# Altium PCB PCB1.PcbDoc
Units mm, origin at the board's own origin, x right, y up, seen from the top; angles counter-clockwise.
Board outline 100 x 100 mm, 2 copper layers (Top Layer, Bottom Layer); 30 components, 22 nets, 87 pads, 11 vias.
Unrouted connection lines stored in the file: 1.
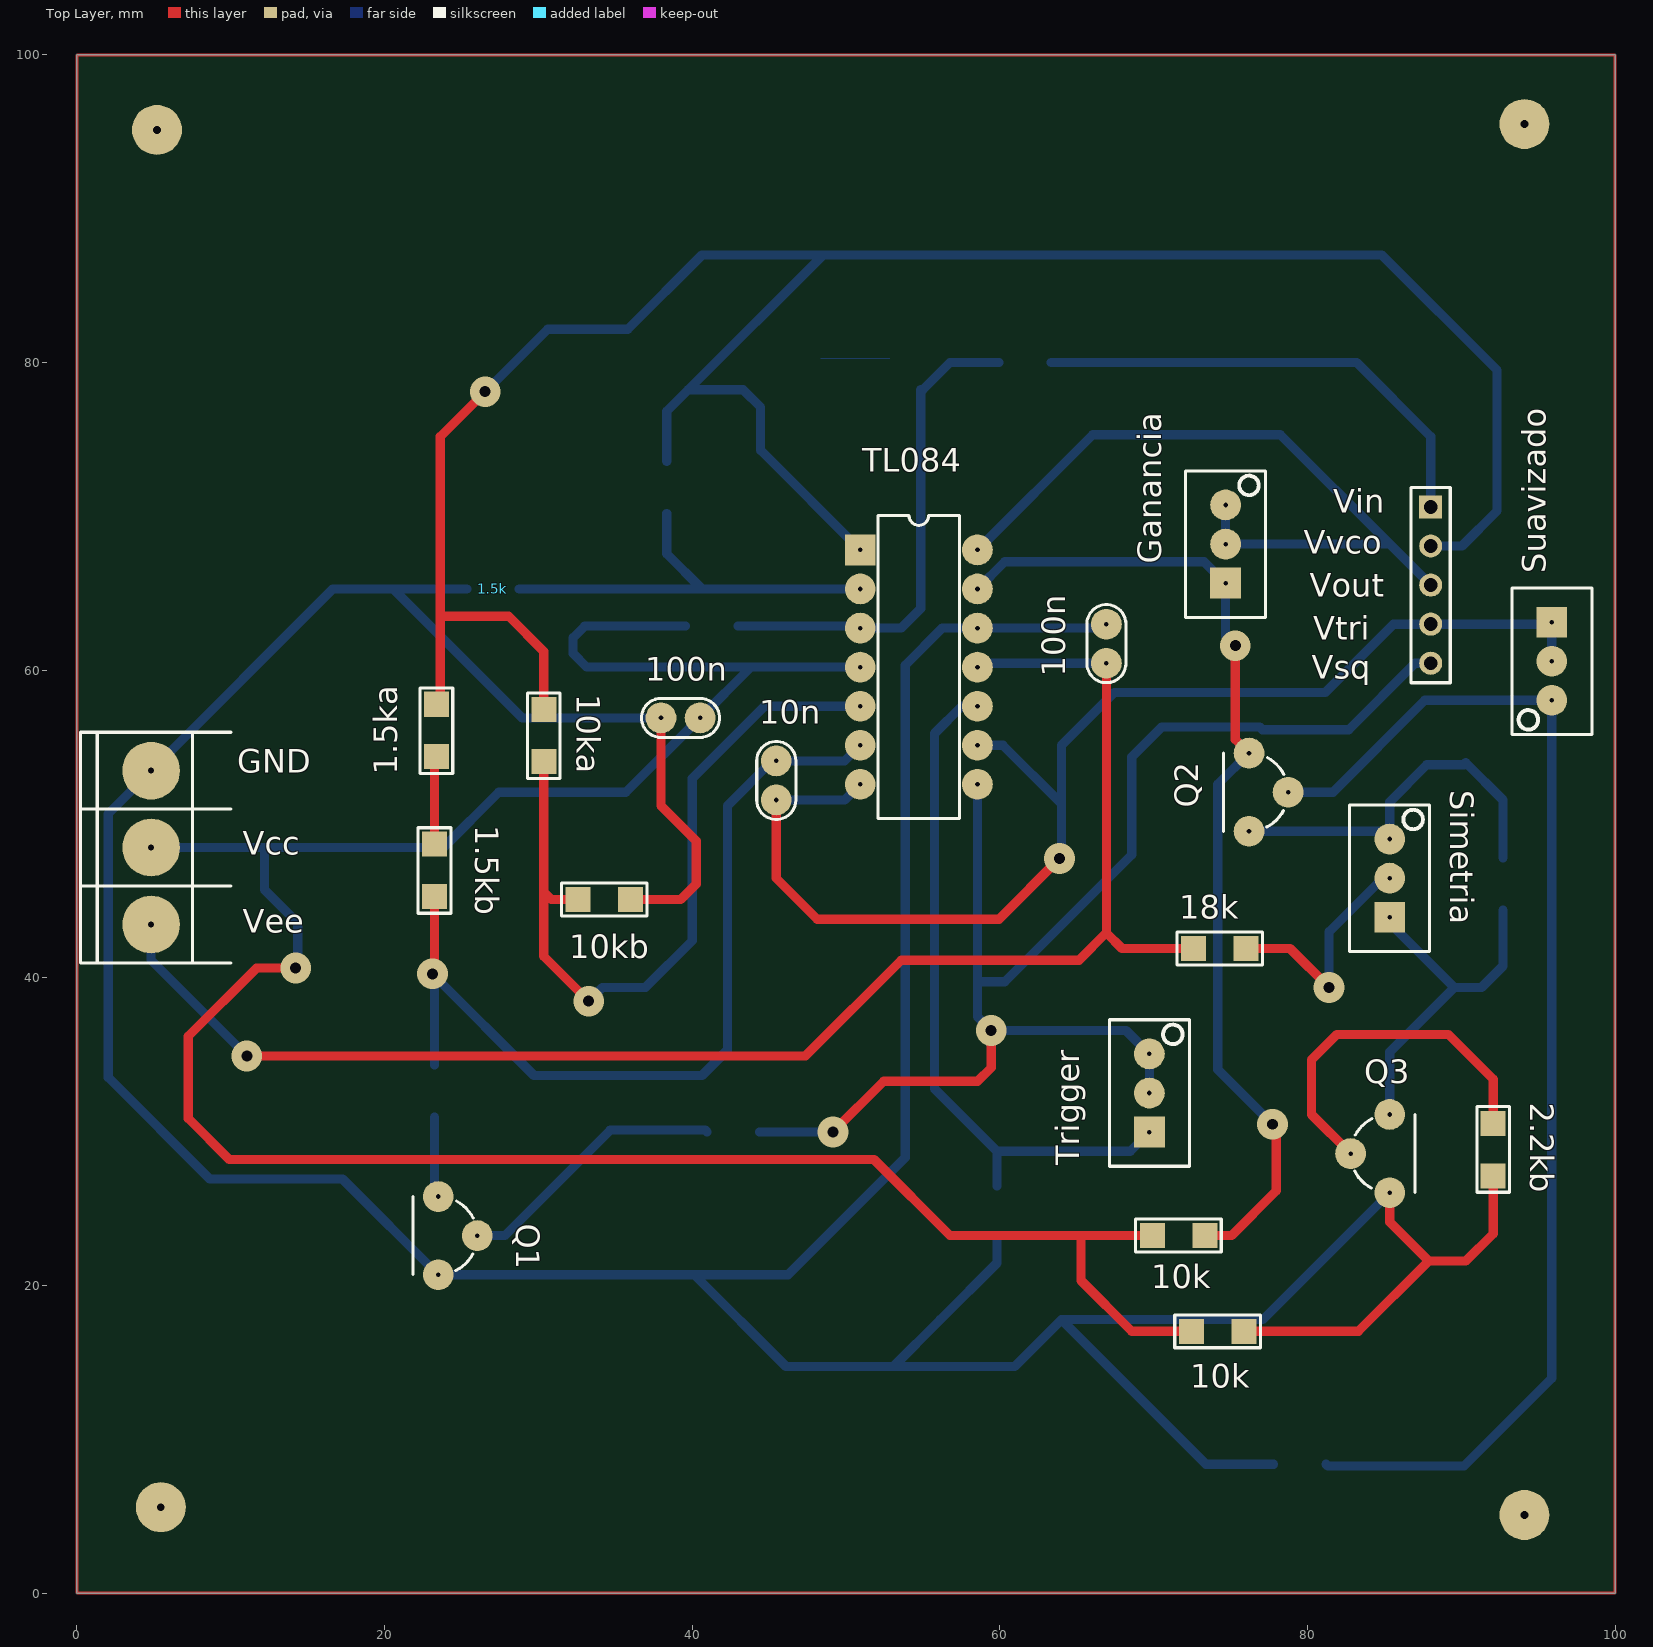
[diagram p0: Top Layer view]
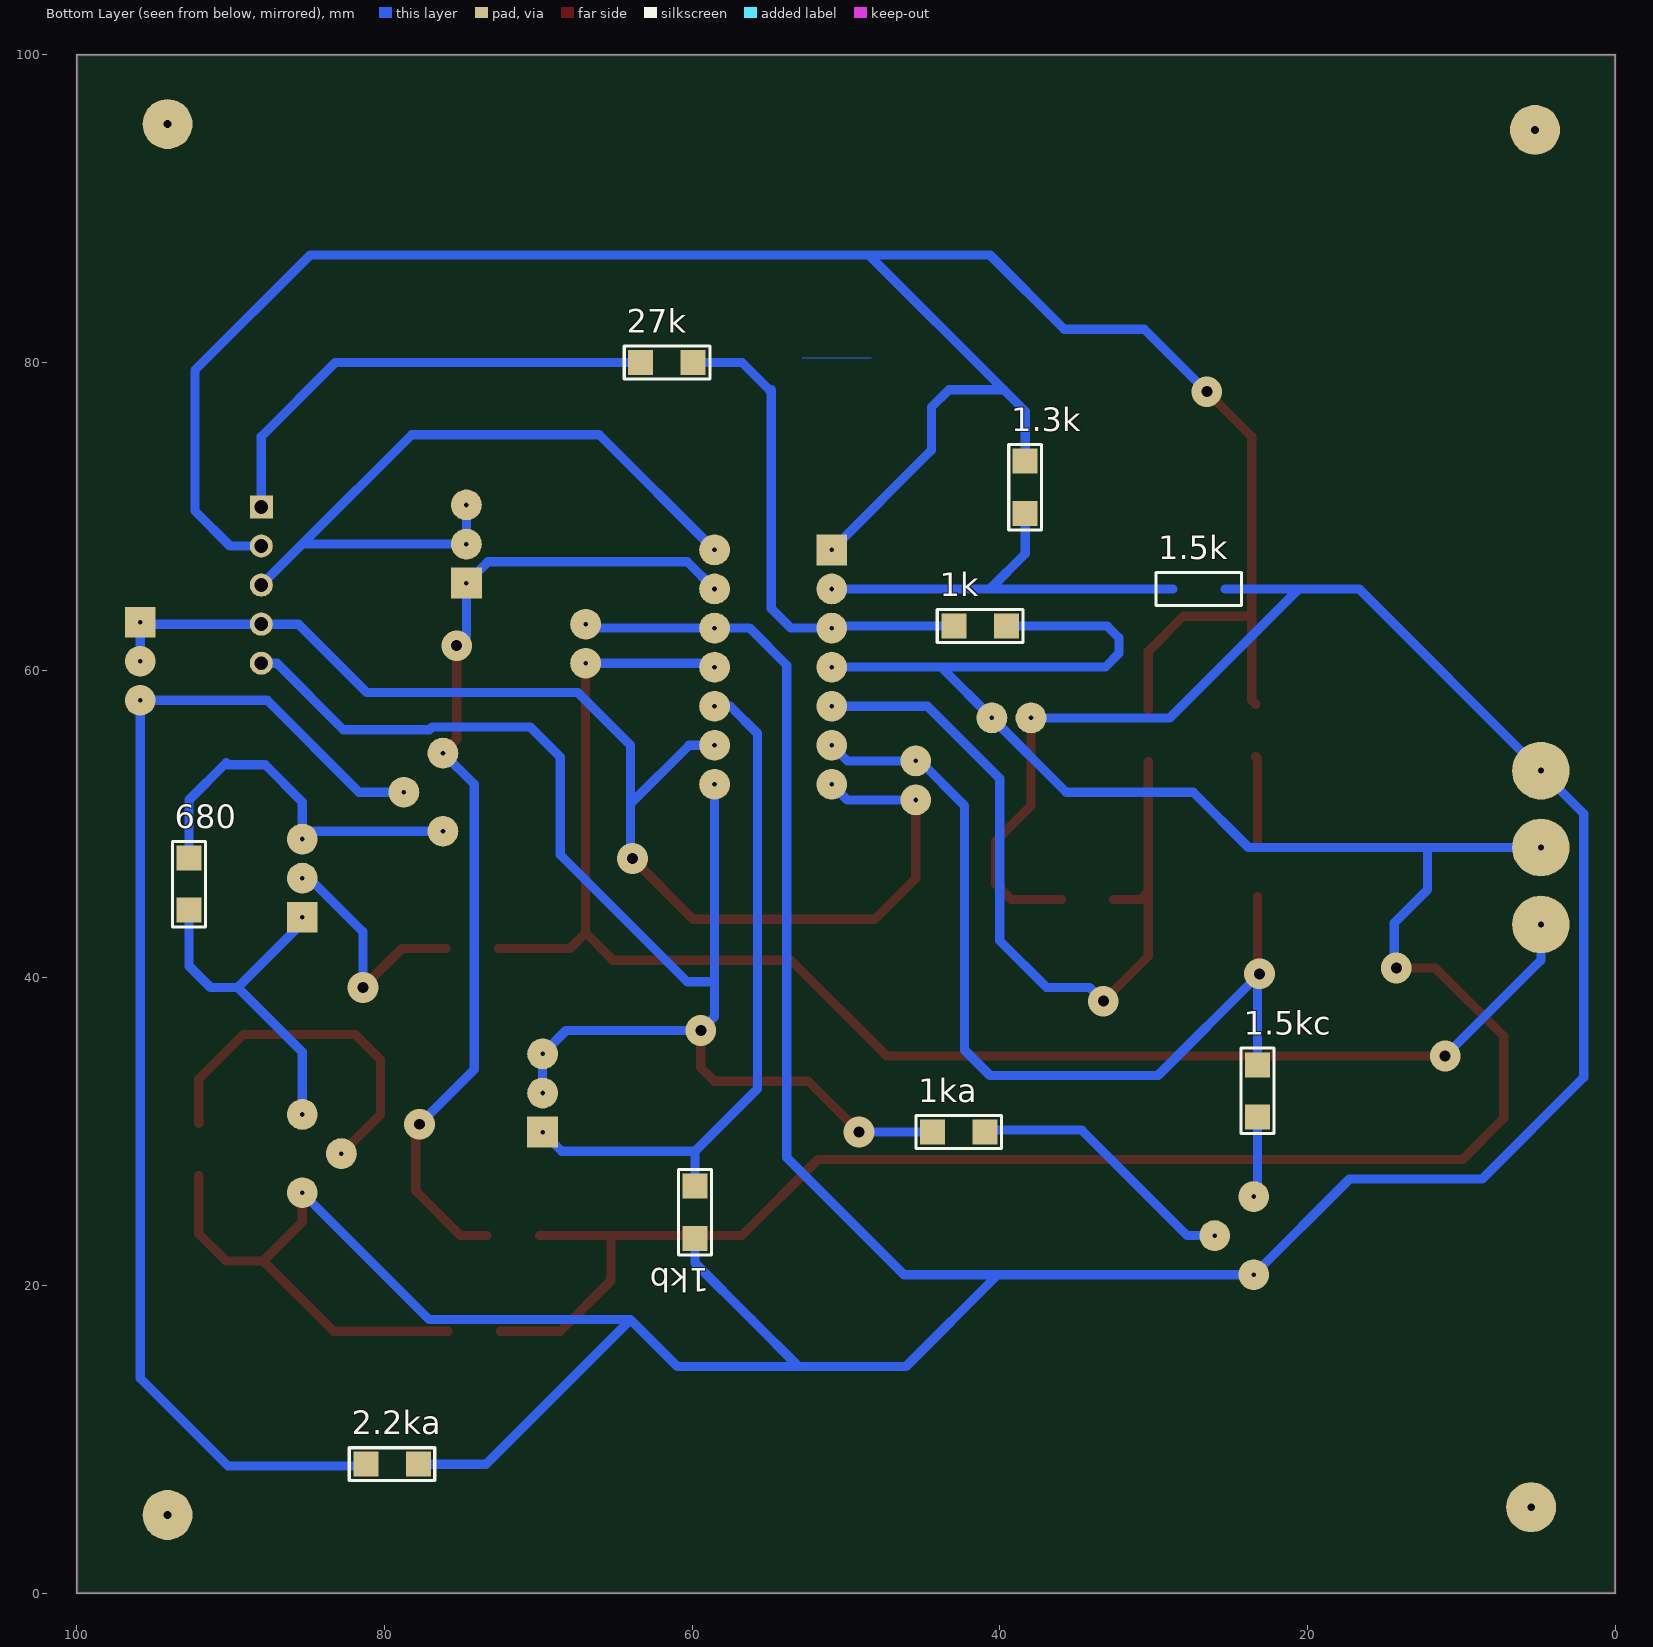
[diagram p1: Bottom Layer view, seen from below]
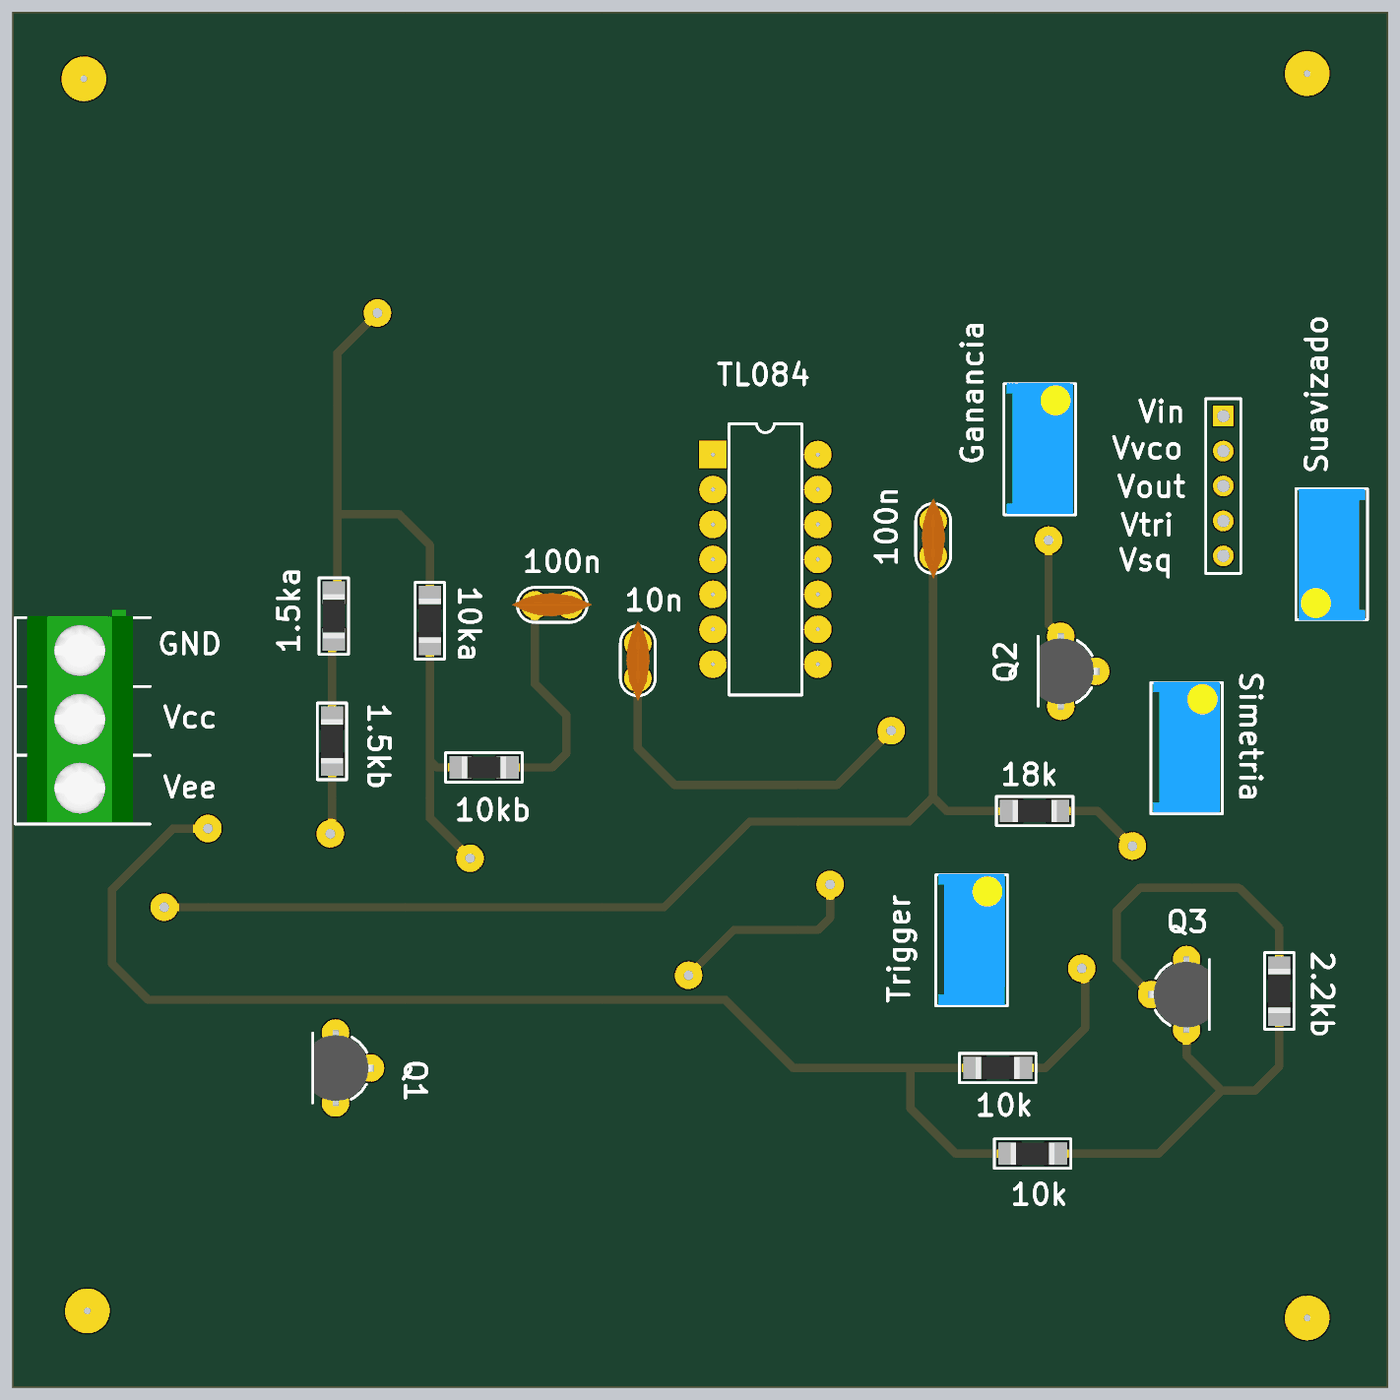
[diagram p2: 3D render of the assembled board from above, using the file's embedded part models]
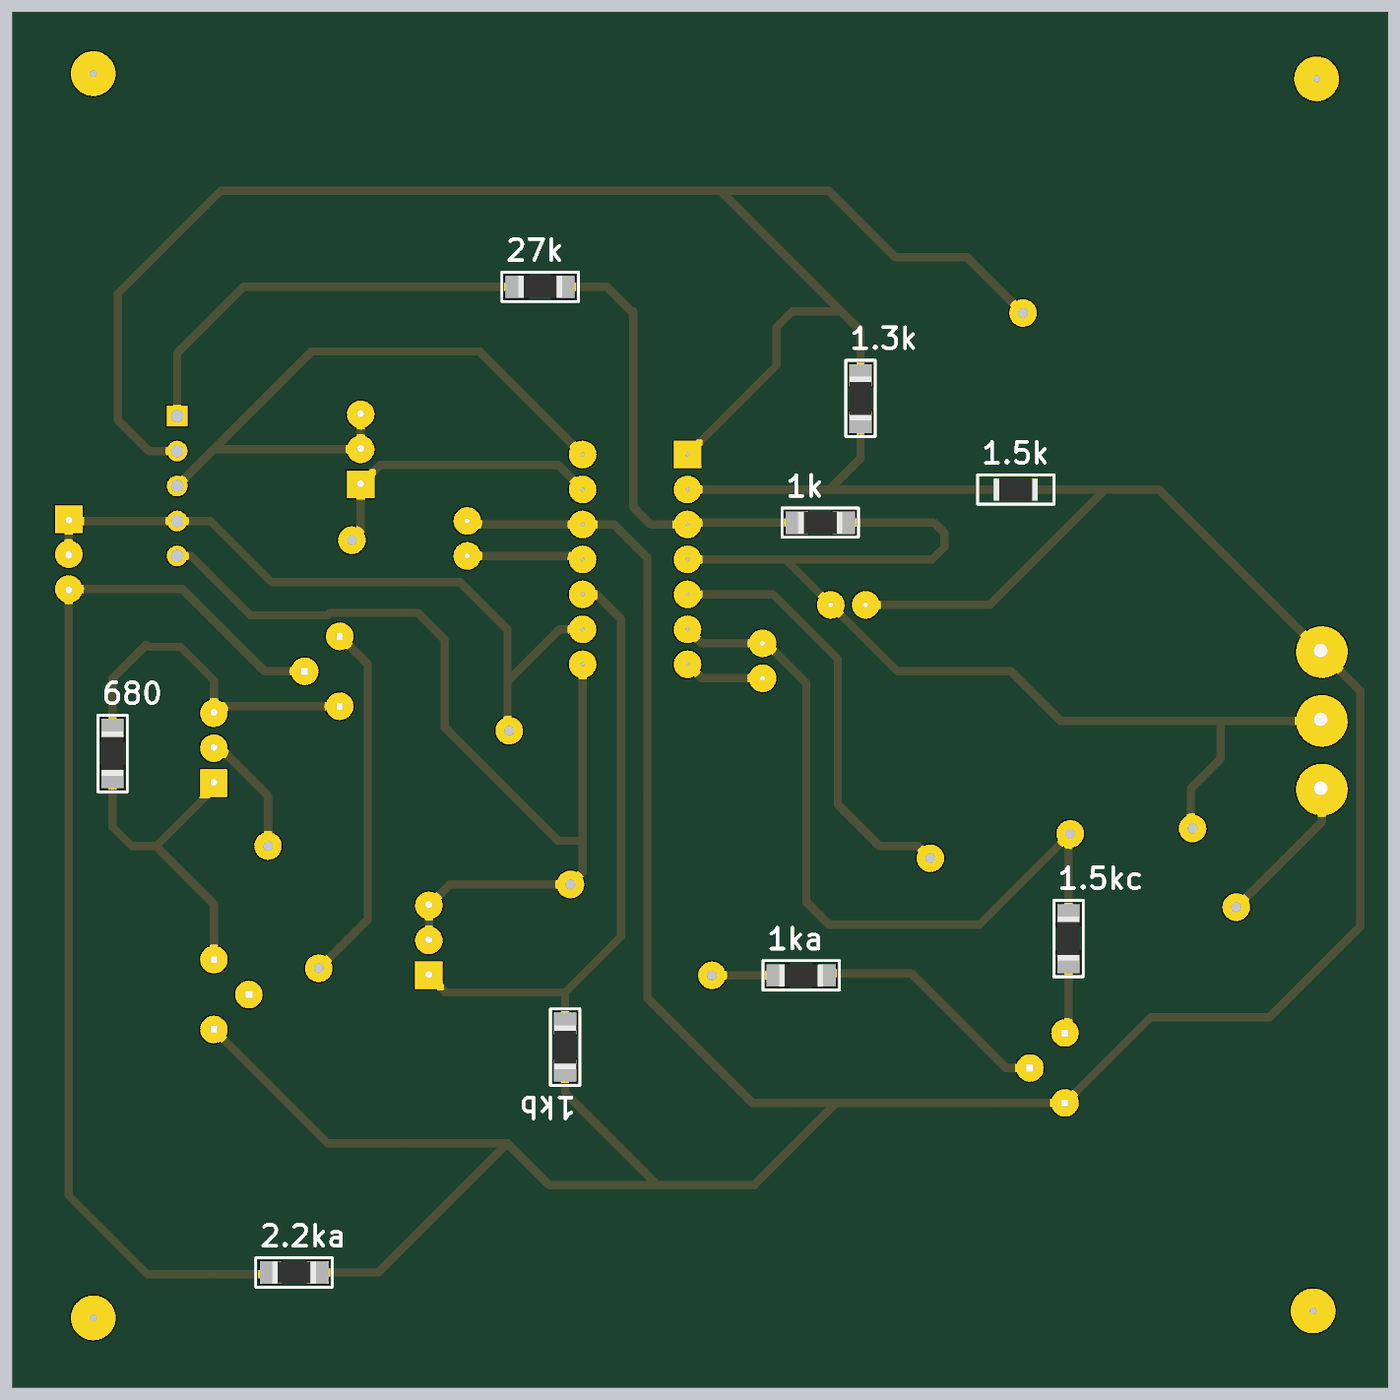
[diagram p3: 3D render of the assembled board from below, using the file's embedded part models]

## Layer stack, top to bottom
Top Solder: solder mask 0.0102, Solder Resist, Dk 3.5
Top Layer: signal copper 0.0356
Dielectric 1: dielectric 0.32, FR-4, Dk 4.8
Bottom Layer: signal copper 0.0356
Bottom Solder: solder mask 0.0102, Solder Resist, Dk 3.5

## Board outline
0,0 100,0 100,100 0,100

## Design rules (kind name [scope] priority, off if disabled: settings)
Clearance [All] p1: gap=0.4 ignorepadtopadclearanceinfootprint=FALSE
PolygonConnect [All] p1: connectstyle=Relief reliefconductorwidth=0.254 reliefentries=4 polygonreliefangle="90 Angle" airgapwidth=0.254
RoutingVias [All] p1: holewidth=0.711 width=2 viastyle="Through Hole" minholewidth=0.711 minwidth=2 maxholewidth=0.711 maxwidth=2
SolderMaskExpansion [All] p1: expansion=0.102
Width [All] p1: maxlimit=0.9 minlimit=0.6 preferedwidth=0.6
30 further rules are at their usual default settings.

## Classes and differential pairs
component class esquematico: 1.3k 1.5k 1.5ka 1.5kb 1.5kc 1k 1ka 1kb 2.2k 2.2ka 2.2kb 5k 10k 10ka 10kb 10n 18k 27k 50k 100k 100n 680 Alimentacion Conectores Q1 Q2 Q3 U1

## Components (designator, comment, footprint, x,y, rotation, side; value= is the part's Value field where it differs from the comment)
1.3k "RES" 1206#1 38.354,71.882 r90 bottom
1.5k "RES" 1206#2 27.051,65.278 r0 top
1.5ka "RES" 1206#1 23.368,56.083 r270 top
1.5kb "RES" 1206#1 23.241,46.99 r270 top
1.5kc "RES" 1206#1 23.241,32.639 r90 bottom
1k "RES" 1206#1 41.275,62.865 r0 bottom
1ka "RES" 1206#1 42.672,29.972 r180 bottom
1kb "RES" 1206#1 59.817,24.765 r270 bottom
2.2ka "RES" 1206#1 79.502,8.382 r0 bottom
2.2kb "RES" 1206#1 92.075,28.829 r90 top
10k "RES" 1206#1 74.168,17.018 r180 top
10k "RES" 1206#1 71.628,23.241 r180 top
10ka "RES" 1206#1 30.353,55.753 r270 top
10kb "RES" 1206#1 34.29,45.085 r180 top
10n "CAP" CAP100 45.466,52.832 r270 top
18k "RES" 1206#1 74.295,41.91 r0 top
27k "RES" 1206#1 61.646,80.01 r180 bottom
100n "CAP" CAP100 39.243,56.896 r0 top
100n "CAP" CAP100 66.929,61.722 r270 top
680 "RES" 1206#1 92.71,46.101 r270 bottom
Conectores "Header 5" HDR1X5 88.011,70.612 r270 top
Ganancia "PRESET" "PRESET V" 74.676,68.199 r90 top (schematic designator 5k)
GND "BORNERA 3" BORNERA3 4.826,48.467 r0 top (schematic designator Alimentacion)
Q1 "TRANSISTOR NPN" TO92 24.765,23.241 r90 top
Q2 "TRANSISTOR NPN" TO92 77.47,52.07 r90 top
Q3 "TRANSISTOR NPN" TO92 84.074,28.575 r270 top
Simetria "PRESET" "PRESET V" 85.344,46.482 r90 top (schematic designator 50k)
Suavizado "PRESET" "PRESET V" 95.885,60.579 r270 top (schematic designator 100k)
TL084 "TL084N" N014 54.737,60.198 r270 top (schematic designator U1)
Trigger "PRESET" "PRESET V" 69.723,32.512 r90 top (schematic designator 5k)

## Footprints (in the part's own frame and the unit in brackets; to place one, negate y for a bottom-side part, rotate by r counter-clockwise, add the part's x,y. Pads: shape width x height; smd on the part's side, far side on the other; paste and mask are expansions set on the pad)
1206#1 [mil] "Pasivo 1206"
  rect 64x64 smd: 1(-67,0) 2(67,0)
  silkscreen extent -109,-42 110,42, body extent -62,-32 63,31, height 20
1206#2 [mil] "Pasivo 1206"
  rect 64x64 on Mech1: 1(-67,0) 2(67,0)
  body extent -62,-31 63,32, height 20
BORNERA3 [mm] "Bornera con Tornillos 5mm separación"
  round 3.75 hole 0.4: 1(0,5) 2(0,0) 3(0,-5)
  silkscreen extent -4.6,-7.5 5.2,7.5, body extent -3.76,-7.39 3.94,8.11, height 10.05
CAP100 [mm]
  round 2 hole 0.3: 1(-1.27,0) 2(1.27,0)
  silkscreen extent -2.54,-1.27 2.54,1.27, body extent -2.92,-0.84 2.92,0.86, height 6.12
HDR1X5 [mm] "Connector; Header; 5 Position"
  rect 1.5x1.5 hole 0.9: 1(0,0)
  round 1.5 hole 0.9: 2(2.54,0) 3(5.08,0) 4(7.62,0) 5(10.16,0)
  silkscreen extent -1.27,-1.27 11.43,1.27
N014 [mm] "DIP; 14 Leads; Row Spacing 7.62 mm; Pitch 2.54 mm"
  rect 2x2 hole 0.3: 1(-7.62,-3.81)
  round 2 hole 0.3: 2(-5.08,-3.81) 3(-2.54,-3.81) 4(0,-3.81) 5(2.54,-3.81) 6(5.08,-3.81) 7(7.62,-3.81) 8(7.62,3.81) 9(5.08,3.81) 10(2.54,3.81) 11(0,3.81) 12(-2.54,3.81) 13(-5.08,3.81) 14(-7.62,3.81)
  silkscreen extent -9.85,-2.65 9.85,2.65
"PRESET V" [mm]
  rect 2x2 hole 0.3: 1(-2.54,0)
  round 2 hole 0.3: 2(0,0) 3(2.54,0)
  silkscreen extent -4.76,-2.6 4.76,2.6, body extent -4.7,-2.42 4.83,2.42, height 11.55
TO92 [mm]
  round 2 hole 0.3: 1(0,-1.27) 2(2.54,1.27) 3(-2.54,1.27)
  silkscreen extent -2.54,-1 2.54,2.92, body extent -2.79,-1.55 2.79,2.79, height 8

## Part data
Conectores: "Header, 5-Pin", LatestRevisionDate=17-Jul-2002, LatestRevisionNote="Re-released for DXP Platform.", Publisher="Altium Limited"
TL084: "JFET-Input Operational Amplifier", ComponentLink1Description="Manufacturer Link", ComponentLink1URL=http://www.ti.com/, ComponentLink2Description=Datasheet, ComponentLink2URL=http://www-s.ti.com/sc/ds/tl084.pdf, DatasheetVersion=Feb-1999, LatestRevisionDate=04-Mar-2005, LatestRevisionNote="Stylized 3D Model Added.", PackageDescription="DIP; 14 Leads; Row Spacing 7.62 mm; Pitch 2.54 mm", PackageReference=N014, PackageVersion=Oct-1995, Published=16-Jan-2001, Publisher="Altium Limited"

## Free pads (board coordinates)
  round 3.25 hole 0.5: 4(5.207,95.123) 4(5.461,5.588) 4(94.107,5.08) 4(94.107,95.504)

## Via types
v1: diameter 2, hole 0.711, Top Layer to Bottom Layer, 11 vias

## Nets (pads, with @x,y where several pads share a name; then routed paths per layer and width w, separated by ;. In a path a pad name is that pad's centre, name@x,y a point inside that pad or via, vN(x,y) a via of type N, cw(c..) or ccw(c..) an arc to the next point about the centre after c; other vN are vias at no path point)
GND: 1kb.2 2.2ka.1 2.2kb.1 10k.1@75.87,17.018 10kb.1 100n.1 GND.1 Q1.3 Q3.2 TL084.12 | length 299.6
  Top Layer w0.6: 10kb.1 39.243,45.085 40.259,46.101 40.259,48.895 37.973,51.181 100n.1@37.973,56.896 ; 10k.1@75.87,17.018 83.312,17.018 87.884,21.59 ; Q3.2 85.344,24.13 87.884,21.59 ; 2.2kb.1 92.075,23.368 90.297,21.59 87.884,21.59
  Bottom Layer w0.6: 25.349,65.278 20.574,65.278 ; 100n.1@37.973,56.896 28.956,56.896 20.574,65.278 ; 1kb.2 59.817,21.463 56.134,17.78 53.086,14.732 ; 100n.1@66.929,62.992 66.675,62.738 TL084.12 56.261,62.738 53.848,60.325 53.848,28.321 46.228,20.701 40.132,20.701 ; 2.2ka.1 73.406,8.382 64.008,17.78 ; Q3.2 77.089,17.78 64.008,17.78 ; 20.574,65.278 16.637,65.278 GND.1 2.032,50.673 2.032,33.528 8.636,26.924 17.272,26.924 Q1.3 40.132,20.701 ; 40.132,20.701 46.101,14.732 53.086,14.732 ; 53.086,14.732 60.96,14.732 64.008,17.78
Net1.3k_1: 1.3k.1 TL084.2 | length 28
  Bottom Layer w0.6: 28.753,65.278 40.64,65.278 ; 1.3k.1 38.354,67.564 40.64,65.278 ; TL084.2 40.64,65.278
Net1.5ka_2: 1.5ka.2 1.5kb.1 | length 5.7
  Top Layer w0.6: 1.5kb.1 23.241,54.254 1.5ka.2
Net1.5kb_2: 1.5kb.2 1.5kc.2 10n.1 TL084.6 | length 59.6
  Top Layer w0.6: v1(23.114,40.259) 23.241,40.386 1.5kb.2
  Bottom Layer w0.6: v1(23.114,40.259) v1@23.241,40.132 ; 1.5kc.2 v1@23.241,40.132 ; TL084.6 49.911,54.102 10n.1 45.212,54.102 42.291,51.181 42.291,35.306 40.64,33.655 29.718,33.655 v1@23.241,40.132
Net1.5kc_1: 1.5kc.1 Q1.2 | length 5.3
  Bottom Layer w0.6: 1.5kc.1 23.241,26.035 Q1.2
Net1k_2: 1k.2 27k.2 TL084.3 | length 37
  Bottom Layer w0: 48.362,80.264 52.832,80.264
  Bottom Layer w0.6: 1k.2 50.8,62.865 TL084.3 53.594,62.738 54.864,64.008 54.864,78.232 54.991,78.232 56.769,80.01 27k.2
Net1ka_2: 1ka.2 Q1.1 | length 17.8
  Bottom Layer w0.6: Q1.1 27.813,23.241 34.671,30.099 40.843,30.099 1ka.2
Net1kb_1: 1kb.1 TL084.10 Trigger.1 | length 45
  Bottom Layer w0.6: TL084.10 57.531,57.658 55.753,55.88 55.753,32.795 59.817,28.731 ; 1kb.1 59.817,28.731 ; Trigger.1 68.482,28.731 59.817,28.731
Net2.2ka_2: 2.2ka.2 Q2.1 Suavizado.3 | length 80.8
  Bottom Layer w0.6: Q2.1 81.661,52.07 87.63,58.039 Suavizado.3 95.885,13.97 90.17,8.255 81.331,8.255 2.2ka.2
Net2.2kb_2: 2.2kb.2 Q3.1 | length 23.7
  Top Layer w0.6: Q3.1 80.264,31.115 80.264,34.671 81.915,36.322 89.154,36.322 92.075,33.401 2.2kb.2
Net5k_1: 10k.1@73.33,23.241 Ganancia.1 Q2.2 TL084.13 | length 66
  Top Layer w0.6: 10k.1@73.33,23.241 75.057,23.241 77.978,26.162 77.978,30.226 v1(77.724,30.48) ; v1(75.311,61.595) 75.311,55.499 Q2.2
  Bottom Layer w0.6: TL084.13 60.325,67.056 73.279,67.056 Ganancia.1 74.676,62.23 v1(75.311,61.595) ; Q2.2@76.073,54.737 Q2.2 74.168,52.578 74.168,34.036 v1(77.724,30.48)
Net10ka_2: 10ka.2 10kb.2 TL084.5 | length 51
  Top Layer w0.6: 10ka.2 30.353,45.593 ; 10kb.2 30.861,45.085 30.353,45.593 ; v1(33.274,38.481) 30.353,41.402 30.353,45.593
  Bottom Layer w0.6: v1(33.274,38.481) 34.163,39.37 36.957,39.37 40.005,42.418 40.005,52.959 44.704,57.658 TL084.5
Net18k_2: 18k.2 Simetria.2 | length 15.5
  Top Layer w0.6: 18k.2 78.867,41.91 v1(81.407,39.37)
  Bottom Layer w0.6: v1(81.407,39.37) 81.407,42.995 84.894,46.482 Simetria.2
Net50k_1: 680.2 Q3.3 Simetria.1 | length 23.7
  Bottom Layer w0.6: Q3.3 85.344,35.179 89.535,39.37 ; Simetria.1 85.344,43.561 89.535,39.37 ; 680.2 92.71,40.767 91.313,39.37 89.535,39.37
Net50k_3: 680.1 Q2.3 Simetria.3 | length 24.9
  Bottom Layer w0.6: Q2.3 84.836,49.53 Simetria.3 85.344,51.435 87.757,53.848 90.17,53.848 90.297,53.975 92.71,51.562 680.1
Vcc: 1k.1 10k.2 100n.2@40.513,56.896 GND.2 TL084.4 | length 172.1
  Top Layer w0.6: v1(14.224,40.64) 11.684,40.64 7.239,36.195 7.239,30.861 9.906,28.194 51.816,28.194 56.769,23.241 65.278,23.241 ; 10k.2@69.926,23.241 65.278,23.241 ; 10k.2@72.466,17.018 68.58,17.018 65.278,20.32 65.278,23.241
  Bottom Layer w0.6: GND.2 12.192,48.467 ; v1(14.224,40.64) 14.351,40.767 14.351,43.561 12.192,45.72 12.192,48.467 ; 1k.1 33.02,62.865 32.258,62.103 32.258,61.087 33.147,60.198 43.815,60.198 ; TL084.4@50.673,60.452 TL084.4 43.815,60.198 ; 12.192,48.467 23.829,48.467 27.432,52.07 35.687,52.07 40.513,56.896 43.815,60.198
Vee: 18k.1 100n.2@66.929,60.452 GND.3 TL084.11 | length 102.4
  Top Layer w0.6: v1(11.049,34.925) 47.371,34.925 53.594,41.148 65.151,41.148 66.929,42.926 ; 100n.2@66.929,60.452 66.929,42.926 ; 18k.1 67.945,41.91 66.929,42.926
  Bottom Layer w0.6: GND.3 4.826,41.148 v1(11.049,34.925) ; TL084.11 58.801,60.452 100n.2@66.929,60.452
Vin: 27k.1 Conectores.1 | length 31.2
  Bottom Layer w0.6: 27k.1 83.185,80.01 88.011,75.184 Conectores.1
Vout: Conectores.3 Ganancia.2 Ganancia.3 TL084.14 | length 49.8
  Bottom Layer w0.6: TL084.14 66.04,75.311 78.232,75.311 85.281,68.263 ; Ganancia.3 Ganancia.2 85.217,68.199 85.281,68.263 ; Conectores.3 85.281,68.263
Vsq: 1ka.1 Conectores.5 TL084.8 Trigger.2 Trigger.3 | length 90.9
  Top Layer w0.6: v1(49.149,29.972) 52.451,33.274 58.547,33.274 59.436,34.163 v1(59.436,36.576)
  Bottom Layer w0.6: 1ka.1 v1(49.149,29.972) ; TL084.8 58.547,39.751 ; Trigger.2 Trigger.3 68.199,36.576 v1(59.436,36.576) 58.547,37.465 58.547,39.751 ; Conectores.5 86.995,60.452 82.677,56.134 77.08,56.134 76.904,56.31 70.534,56.31 68.58,54.356 68.58,48.006 60.325,39.751 58.547,39.751
Vtri: 10n.2 Conectores.4 Suavizado.1 Suavizado.2 TL084.7 TL084.9 | length 84.3
  Top Layer w0.6: 10n.2 45.466,46.482 48.133,43.815 59.944,43.815 v1(63.881,47.752)
  Bottom Layer w0.6: 10n.2 49.911,51.562 TL084.7 ; TL084.9 60.198,55.118 64.008,51.308 ; v1(63.881,47.752) 64.008,47.879 64.008,51.308 ; Suavizado.2 Suavizado.1 95.758,62.992 Conectores.4 85.598,62.992 81.153,58.547 67.437,58.547 64.008,55.118 64.008,51.308
Vvco: 1.3k.2 1.5ka.1 10ka.1 Conectores.2 TL084.1 | length 154.8
  Top Layer w0.6: 1.5ka.1 23.622,58.039 23.622,63.5 ; v1(26.543,78.105) 23.622,75.184 23.622,63.5 ; 10ka.1 30.353,61.214 28.067,63.5 23.622,63.5
  Bottom Layer w0.6: v1(26.543,78.105) 30.607,82.169 35.814,82.169 40.64,86.995 48.514,86.995 ; 1.3k.2 38.354,76.835 39.751,78.232 ; TL084.1 44.45,74.295 44.45,77.089 43.307,78.232 39.751,78.232 ; Conectores.2 90.043,68.072 92.329,70.358 92.329,79.502 84.836,86.995 48.514,86.995 ; 39.751,78.232 48.514,86.995
pads on no net: 1.5k.1 1.5k.2
copper on no net: | length 1200
  Top Layer w0.1: 0,0 0,100 100,100 100,0 0,0
  Top Layer w0.2: 0,0 0,100 100,100 100,0 0,0
  Bottom Layer w0.1: 0,0 0,100 100,100 100,0 0,0

## Silkscreen, mask and mechanical layers (free items; w line width, h text height)
Top Overlay:
  text "Vin" at 81.661,70.231 h1.52
  text "Vvco" at 79.756,67.564 h1.52
  text "Vout" at 80.137,64.77 h1.52
  text "Vtri" at 80.391,61.976 h1.52
  text "Vsq" at 80.264,59.436 h1.52
  text "Vcc" at 10.795,48.006 h1.52
  text "Vee" at 10.795,42.926 h1.52